# EAGLE board Pressure_v12_120121 (EAGLE 9.6.2)
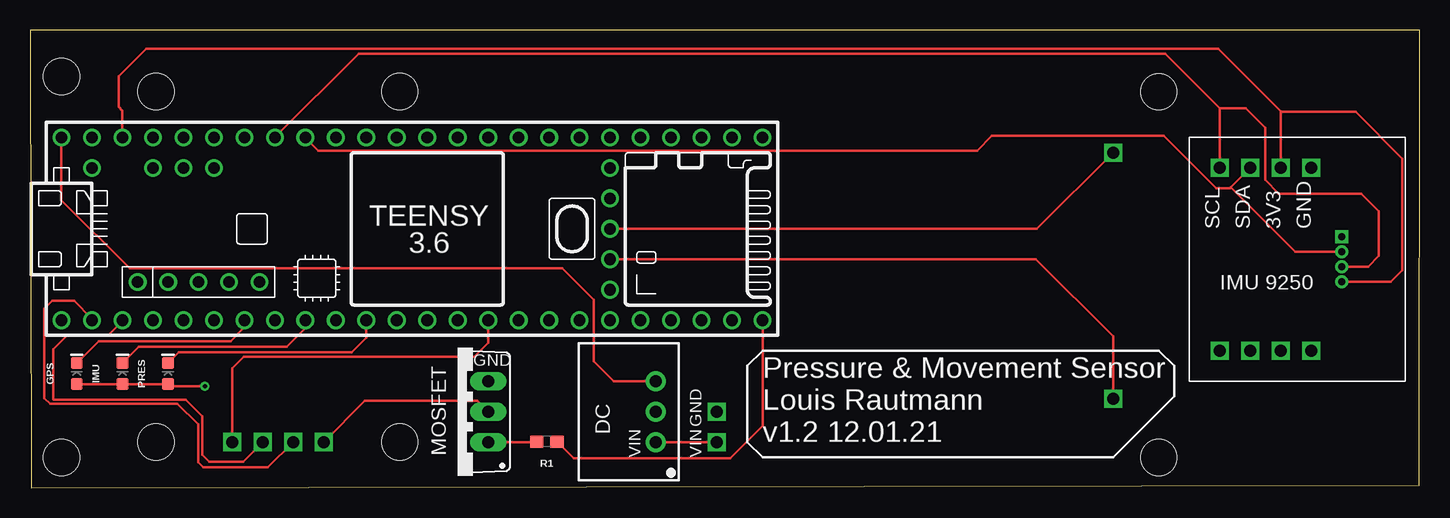
[diagram p0: board, top side]
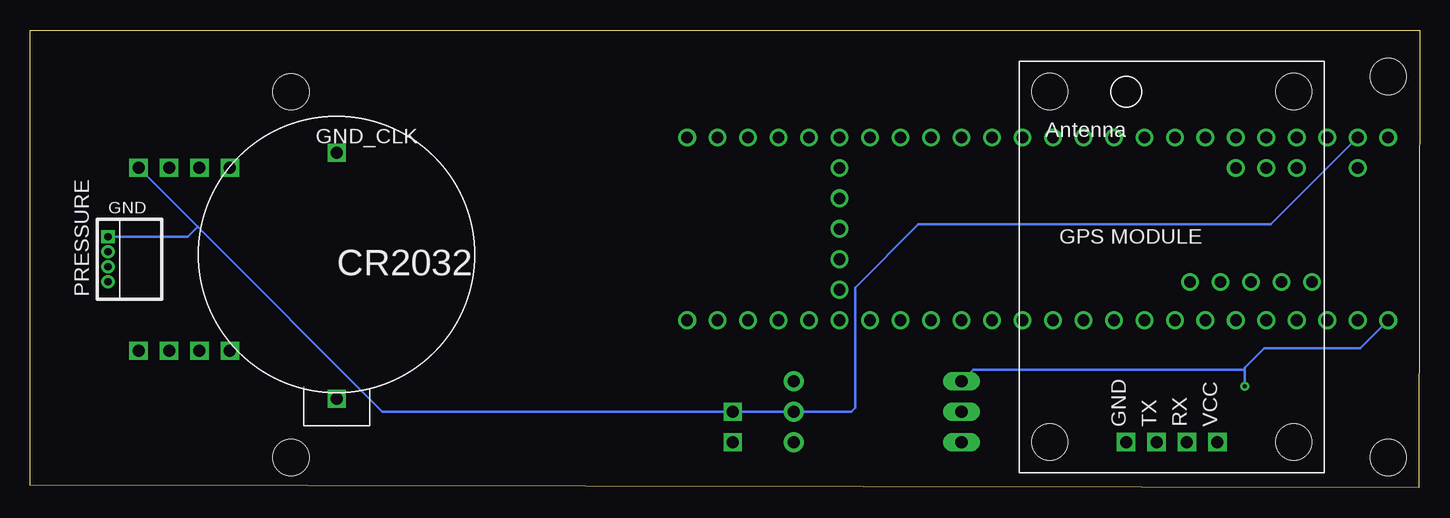
[diagram p1: board, bottom side, seen from below]

Size 115.81 x 38.16 mm. Coordinates in mm from the lower left corner, seen from the top.
Outline: 0.08,0 115.78,0.21 115.81,38.15 0,38.16 0.08,0
Copper layers (1*16): Top 0.035mm / dielectric 1.5mm / Bottom 0.035mm
Design rules "default": minimum track width 6mil, minimum drill 0.35mm, track to track 6mil, track to pad 6mil, pad to pad 6mil, via to via 6mil, smd to smd 6mil, copper to edge 40mil, drill to drill 6mil, minimum pad ring 10mil, minimum via ring 8mil, stop-mask expansion 4mil, vias tented up to drill 0mil, thermal gap 10mil
Holes 3 mm at 2.62,2.54 2.62,34.29 94.06,2.54 94.06,33.02

## Footprints (pad centres in the part's own frame; a part is rotated, then mirrored left to right if it is on the bottom)
SIP3 = drill 1 pad 1.676: 1 -2.54,0; 2 0,0; 3 2.54,0
PAD = drill 1 square: PAD 0,0
CR2032_HOLDER_RSPRO = drill 1 square: NEG 0,0; POS 0,-20.5
LED-0603 = smd 1 x 1: A -0.877,0; C 0.877,0
TO220BV = drill 1.016 long: D 0,-2.54; G -2.54,-2.54; S 2.54,-2.54
DF13-4P-1.25DS = drill 0.6 pad 1.016 square: P$1 1.875,0 | drill 0.6 pad 1.016: P$2 0.625,0; P$3 -0.625,0; P$4 -1.875,0
0603 = smd 1.1 x 1: 1 -0.85,0; 2 0.85,0
TEENSY_3.5/3.6 = drill 0.965: 0/RX -25.4,-7.62; 1/TX -22.86,-7.62; 2 -20.32,-7.62; 3/CANTX -17.78,-7.62; 3V3 7.62,-7.62; 3V3_2 17.78,-2.54; 3V3_LO -22.86,7.62; 4/CANRX -15.24,-7.62; 5 -12.7,-7.62; 6 -10.16,-7.62; 7 -7.62,-7.62; 8 -5.08,-7.62; 9/CS -2.54,-7.62; 10/CS 0,-7.62; 11/MOSI 2.54,-7.62; 12/MISO 5.08,-7.62; 13/SCK 5.08,7.62; 14/A0 2.54,7.62; 15/A1 0,7.62; 16/A2 -2.54,7.62; 17/A3 -5.08,7.62; 18/A4/SDA -7.62,7.62; 19/A5/SCL -10.16,7.62; 20/A6 -12.7,7.62; 21/A7 -15.24,7.62; 21/DAC0 12.7,7.62; 22/A8 -17.78,7.62; 23/A9 -20.32,7.62; 24 10.16,-7.62; 25 12.7,-7.62; 26 15.24,-7.62; 27 17.78,-7.62; 28 20.32,-7.62; 29 22.86,-7.62; 30 25.4,-7.62; 31/A12 27.94,-7.62; 32/A13 30.48,-7.62; 33/A14 30.48,7.62; 34/A15 27.94,7.62; 35/A16 25.4,7.62; 36/A17 22.86,7.62; 37/A18 20.32,7.62; 38/A19 17.78,7.62; 39/A20 15.24,7.62; A10 -17.78,5.08; A11 -15.24,5.08; A22/DAC1 10.16,7.62; AGND -25.4,7.62; AREF -20.32,5.08; GND -27.94,-7.62; GND2 7.62,7.62; GND3 17.78,0; PROG 17.78,2.54; RESET 17.78,5.08; U5V -21.59,-4.445; UD+ -16.51,-4.445; UD- -19.05,-4.445; UGND1 -13.97,-4.445; UGND2 -11.43,-4.445; VBAT 17.78,-5.08; VIN -27.94,7.62; VUSB -25.4,5.08
GPS = drill 1 square: GND 3.81,5.08; RX -1.27,5.08; TX 1.27,5.08; VCC -3.81,5.08 | hole 3: -10.16,5.08; 10.16,5.08; -10.16,-24.13; 10.16,-24.13
IMU = drill 1 square: 3V3 -5.08,7.62; GND -2.54,7.62; HOLD1 -10.16,-7.62; HOLD2 -7.62,-7.62; HOLD3 -5.08,-7.62; HOLD4 -2.54,-7.62; SCL -10.16,7.62; SDA -7.62,7.62

## Placement (x,y rotation side)
DC  R-78C5.0-1.0  [SIP3]  52.15,6.35 90 top
GND  PAD  [PAD]  57.23,6.35 0 bottom
GND_CLK  CR2032HOLDER  [CR2032_HOLDER_RSPRO]  90.25,27.94 0 bottom
GPS  BLUE  [LED-0603]  3.89,9.53 90 top
IMU  GREEN  [LED-0603]  7.7,9.53 90 top
MOSFET  BUZ11BV  [TO220BV]  35.64,6.35 90 top
PRES  WHITE  [LED-0603]  11.51,9.53 90 top
PRESSURE  DF13-4P-1.25DS  [DF13-4P-1.25DS]  109.3,19.05 90 bottom
R1  100  [0603]  43.07,3.86 180 top
U$1  TEENSY_3.5/3.6  [TEENSY_3.5/3.6]  30.56,21.59 0 top
U$2  GPS  [GPS]  20.66,8.9 180 bottom
U$6  IMU  [IMU]  109.3,19.05 0 top
VIN  PAD  [PAD]  57.23,3.81 0 top

## Library data of the parts
DC = dc-dc-converter
GND GND_CLK U$2 U$6 VIN = CR2032
GPS = SparkFun-LED; PROD_ID: DIO-08575
IMU = SparkFun-LED; PROD_ID: DIO-00821
MOSFET = transistor-power
PRES = SparkFun-LED; PROD_ID: DIO-09004
PRESSURE = con-hirose-df13
R1 = SparkFun-Resistors; PROD_ID: RES-07863
U$1 = Teensy356

## Nets
N$1: GND_CLK.POS U$1.3V3_2
N$2: GND_CLK.NEG U$1.GND3
N$4: PRESSURE.P$4 U$1.3V3_LO U$6.3V3
N$5: PRESSURE.P$2 U$1.18/A4/SDA U$6.SDA
N$6: PRESSURE.P$3 U$1.19/A5/SCL U$6.SCL
N$7: R1.1 U$1.32/A13
N$8: MOSFET.G R1.2
N$9: GPS.A IMU.A MOSFET.S PRES.A U$1.GND
N$10: MOSFET.D U$2.GND
N$11: U$1.3V3 U$2.VCC
N$12: U$1.0/RX U$2.TX
N$13: U$1.1/TX U$2.RX
N$14: GPS.C U$1.5
N$15: IMU.C U$1.7
N$16: DC.3 U$1.VIN
N$17: PRES.C U$1.9/CS
N$18: DC.1 VIN.PAD
N$19: DC.2 GND.PAD PRESSURE.P$1 U$1.AGND U$6.GND

## Tracks (layer width: path | path; a pad name or v marks a point on that pad's centre or on a via)
N$1
  Top 0.2: U$1.3V3_2 83.82,19.05 90.25,12.62 GND_CLK.POS
N$2
  Top 0.2: U$1.GND3 83.9,21.59 GND_CLK.NEG
N$4
  Top 0.2: U$1.3V3_LO 7.7,31.42 7.39,31.74 7.39,34.32 9.67,36.61 99.02,36.61 104.22,31.4 | 104.22,31.4 U$6.3V3 | 104.22,31.4 104.3,31.33 110.47,31.33 114.36,27.44 114.36,18.13 113.4,17.18 PRESSURE.P$4
N$5
  Top 0.2: U$1.18/A4/SDA 24.04,28.11 78.94,28.11 80.16,29.33 94.5,29.33 98.84,24.99 100,24.99 100.07,25.06 | 100.07,25.06 U$6.SDA | PRESSURE.P$2 105.45,19.68 100.07,25.06
N$6
  Top 0.2: U$1.19/A5/SCL 27.39,36.19 94.59,36.19 99.14,31.64 | 99.14,31.64 U$6.SCL | PRESSURE.P$3 111.51,18.43 112.41,19.33 112.41,23.07 110.96,24.52 104.08,24.52 102.92,25.68 102.92,30.02 101.3,31.64 99.14,31.64
N$7
  Top 0.2: R1.1 45.31,2.48 58.36,2.48 61.04,5.17 U$1.32/A13
N$8
  Top 0.2: MOSFET.G 42.17,3.81 R1.2
N$9  (via drill 0.35)
  Top 0.2: GPS.A IMU.A PRES.A 11.7,8.46 v14.58,8.46
  Bottom 0.2: U$1.GND 4.95,11.64 12.95,11.64 14.58,10.01 14.58,9.86 | 14.58,9.86 v14.58,8.46 | 14.58,9.86 37.22,9.86 MOSFET.S
N$10
  Top 0.2: U$2.GND 27.9,7.25 37.29,7.25 MOSFET.D
N$11
  Top 0.2: U$2.VCC 16.85,9.97 17.82,10.94 37.02,10.94 38.18,12.11 U$1.3V3
N$12
  Top 0.2: U$2.TX 19.82,1.71 14.44,1.71 14,2.15 14,5.28 12.29,7 1.68,7 1.2,7.48 1.2,14.92 1.87,15.59 3.67,15.59 5.16,14.1 U$1.0/RX
N$13
  Top 0.2: U$2.RX 17.75,2.18 14.95,2.18 14.36,2.77 14.36,5.95 12.96,7.35 1.99,7.35 1.96,7.38 1.96,11.56 3.11,12.72 6.53,12.72 7.7,13.89 U$1.1/TX
N$14
  Top 0.2: GPS.C 5.73,12.23 16.71,12.23 17.86,13.38 U$1.5
N$15
  Top 0.2: IMU.C 9.07,11.77 21.4,11.77 22.94,13.31 U$1.7
N$16
  Top 0.2: U$1.VIN 2.62,23.98 8.3,18.3 44.35,18.3 46.98,15.67 46.98,10.55 48.64,8.89 DC.3
N$17
  Top 0.2: PRES.C 12.4,11.29 26.79,11.29 28.02,12.52 U$1.9/CS
N$18
  Top 0.2: DC.1 VIN.PAD
N$19
  Bottom 0.2: U$1.AGND 12.41,21.96 41.78,21.96 47.05,16.69 47.05,6.67 47.38,6.35 DC.2 GND.PAD 86.44,6.35 101.84,21.74 | 101.84,21.74 U$6.GND | PRESSURE.P$1 102.65,20.93 101.84,21.74

## Text on the board
tPlace: GND | GND | Pressure & Movement Sensor / Louis Rautmann / v1.2 12.01.21 | VIN | VIN
bPlace: GND